# EAGLE board pcb_tsc (EAGLE 9.7.0)
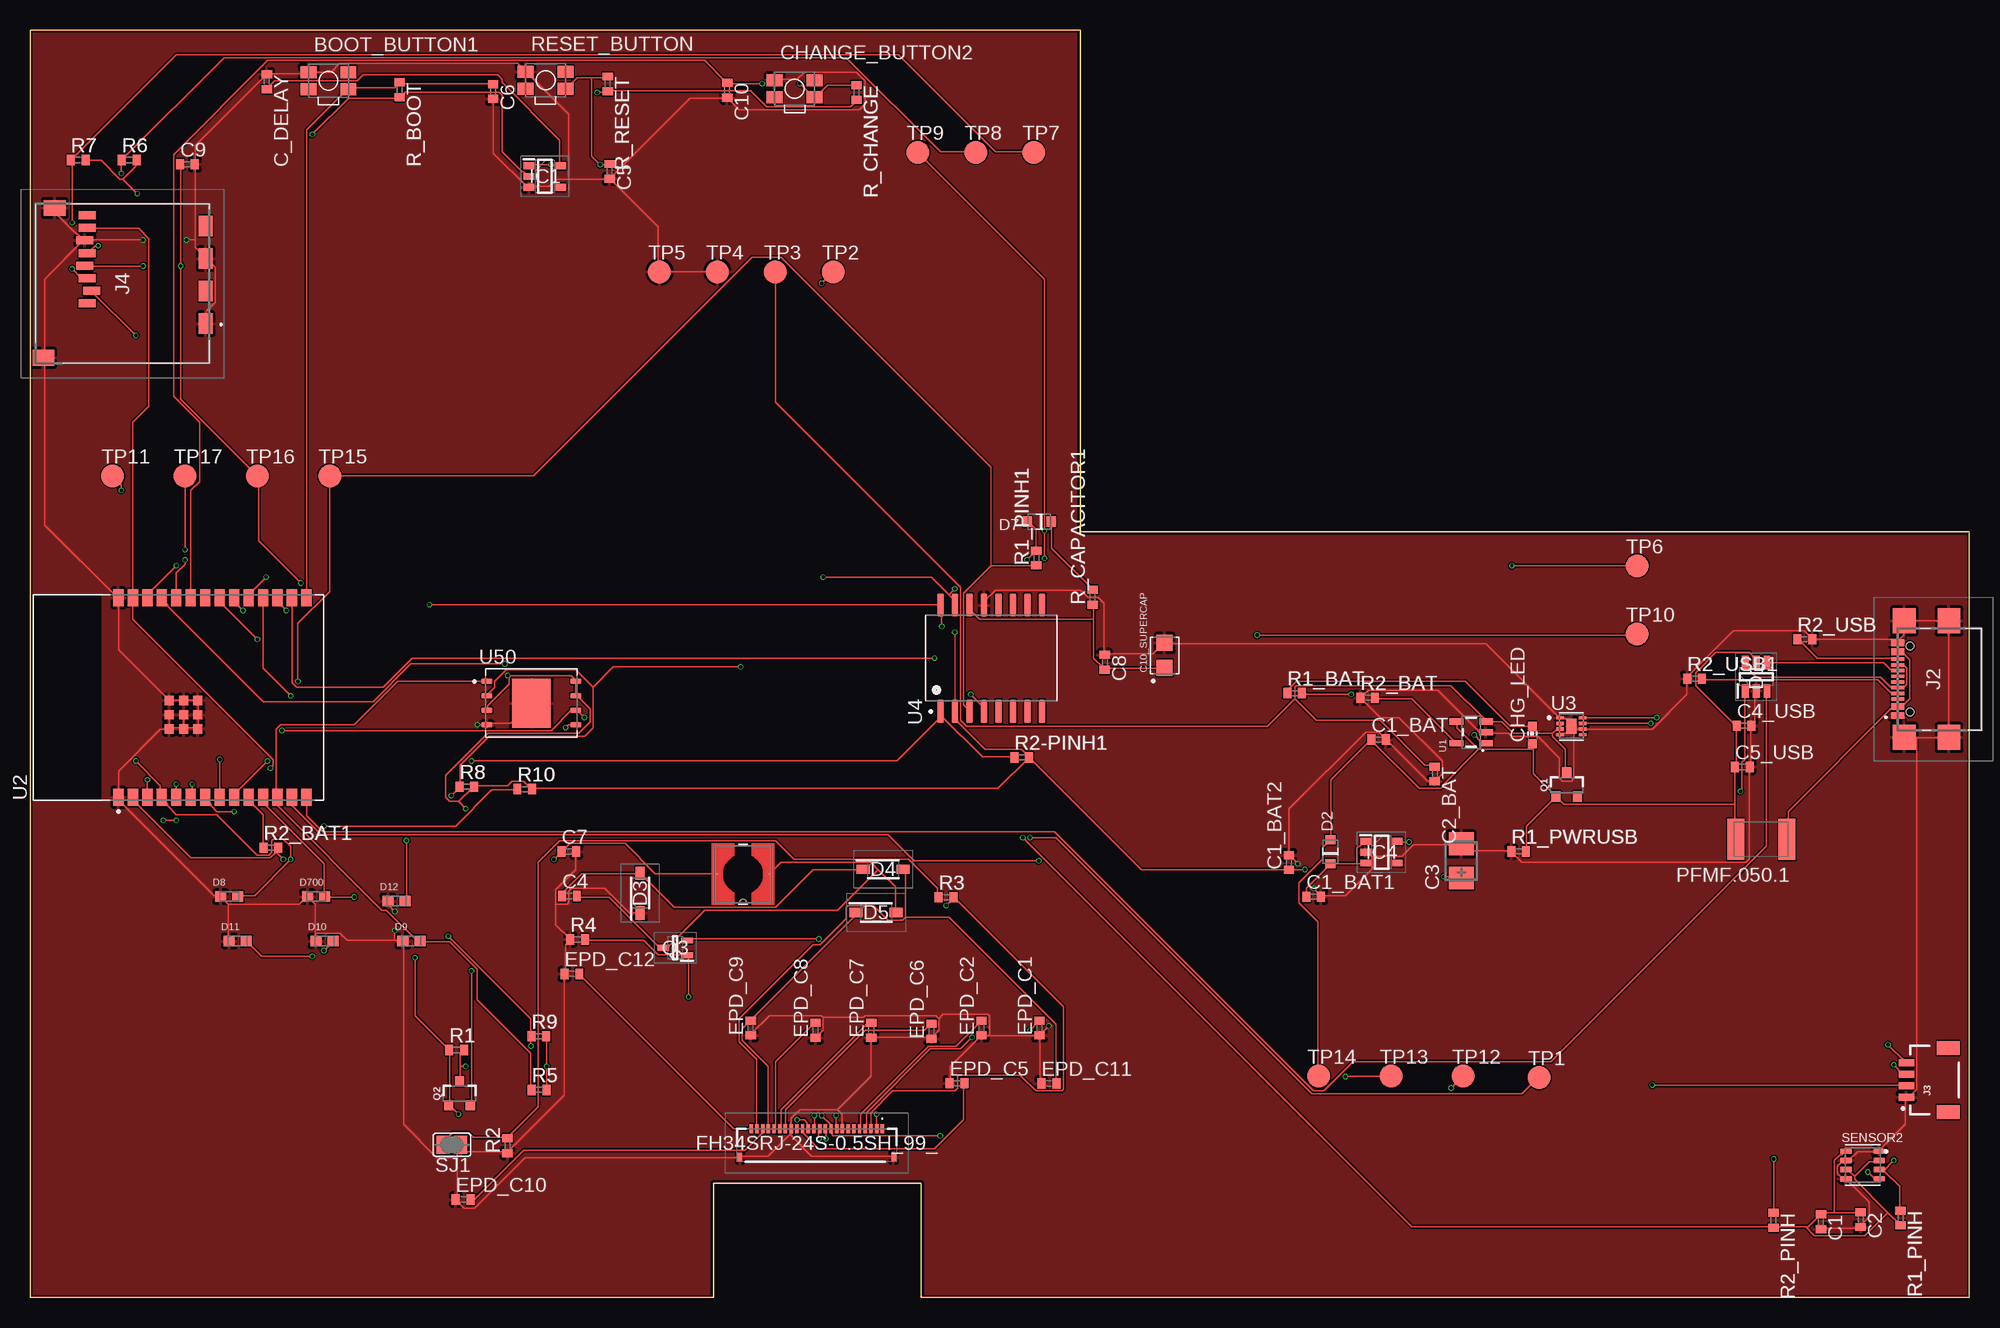
[diagram p0: board, top side]
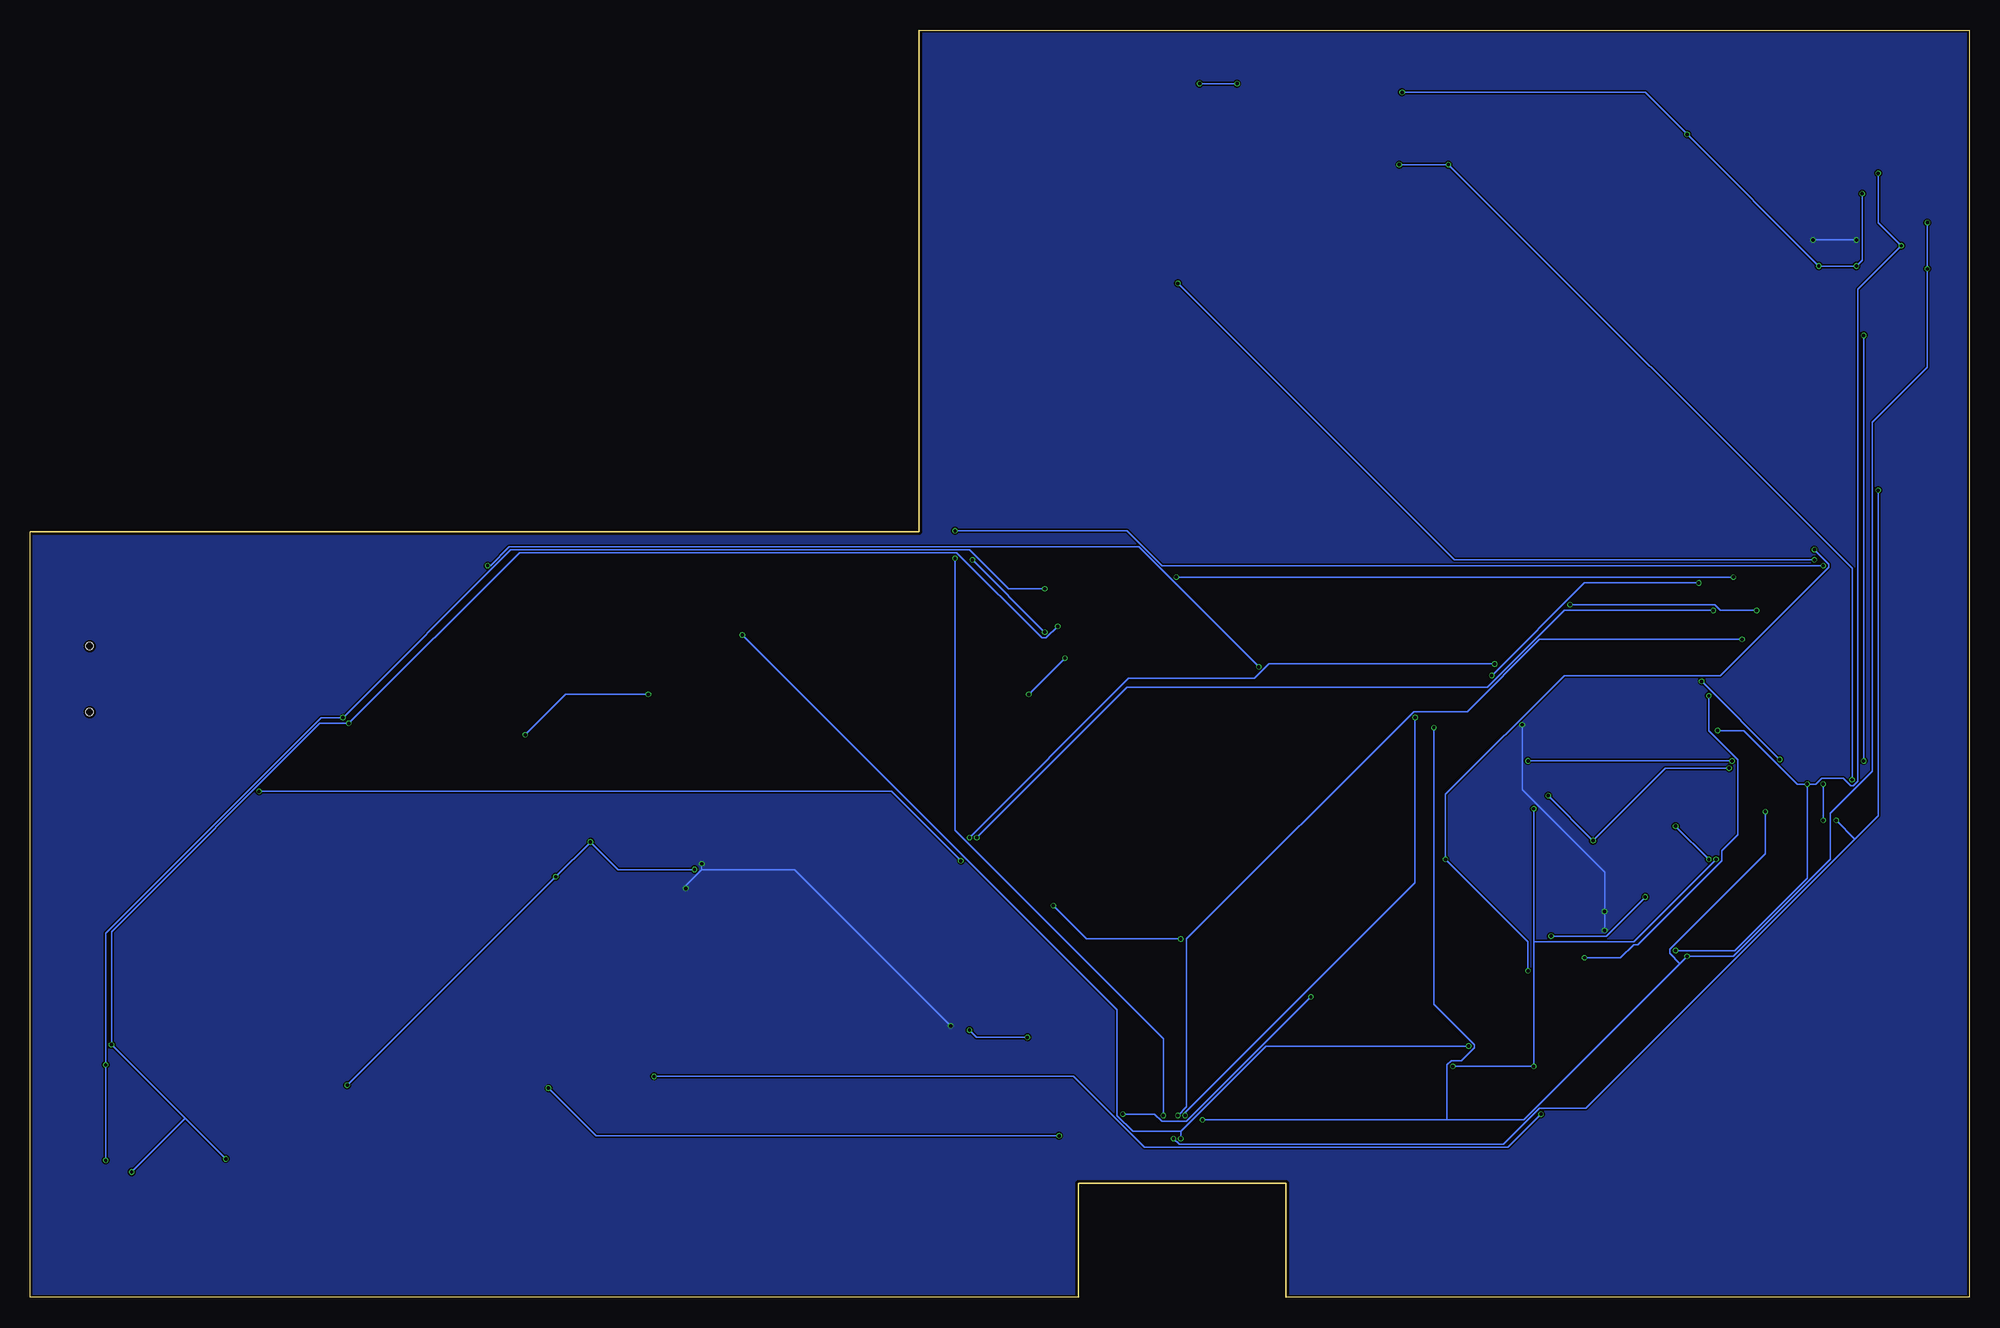
[diagram p1: board, bottom side, seen from below]

Size 170.2 x 111.2 mm. Coordinates in mm from the lower left corner, seen from the top.
Outline: 0,0 60,0 60,10 78.2,10 78.2,0 170.2,0 170.2,67.2 92.2,67.2 92.2,111.2 0,111.2 0,0
Copper layers (1*16): Top 0.035mm / dielectric 1.6mm / Bottom 0.035mm
Design rules "jlcpcb-2layers.dru": minimum track width 5mil, minimum drill 0.3mm, track to track 5mil, track to pad 5mil, pad to pad 5mil, via to via 5mil, smd to smd 5mil, copper to edge 0.2mm, drill to drill 6mil, minimum pad ring 10mil, minimum via ring 3mil, stop-mask expansion 4mil, vias tented up to drill 0mil, thermal gap 10mil

## Footprints (pad centres in the part's own frame; a part is rotated, then mirrored left to right if it is on the bottom)
MYBUTTON = smd 1.4 x 1.05: 1 1.75,0.75; 2 -1.75,0.75; 3 -1.75,-0.75; 4 1.75,-0.75
EAGLE-LTSPICE_C0402 = smd 0.7 x 0.9: 1 -0.65,0; 2 0.65,0
RCL_CT3528 = smd 2 x 2.2: + -1.5,0; - 1.5,0
CAPCP3225X100N = smd 1.4 x 1.4: 1 -1.1,0; 2 1.1,0
ADAFRUIT_CHIP-LED0603 = smd 0.8 x 0.8: A 0,-0.75; C 0,0.75
SOT95P280X145-6N = smd 1.2 x 0.6: 1 -1.25,0.95; 2 -1.25,0; 3 -1.25,-0.95; 4 1.25,-0.95; 5 1.25,0; 6 1.25,0.95
ESP32_WROVER_AVX---SD0805S020S1R0_AVX_SD0805S020S1R0_0 = smd 0.8 x 0.9: 1 -1.05,0; 2 1.05,0
SOD3716X135N = smd 1.15 x 0.8: 1 -1.75,0; 2 1.75,0
DIOC1608X36N = smd 0.97 x 0.94: 1 -0.75,0; 2 0.75,0
FH34SRJ24S05SH99 = smd 0.3 x 0.8: 1 5.75,1.45; 2 5.25,1.45; 3 4.75,1.45; 4 4.25,1.45; 5 3.75,1.45; 6 3.25,1.45; 7 2.75,1.45; 8 2.25,1.45; 9 1.75,1.45; 10 1.25,1.45; 11 0.75,1.45; 12 0.25,1.45; 13 -0.25,1.45; 14 -0.75,1.45; 15 -1.25,1.45; 16 -1.75,1.45; 17 -2.25,1.45; 18 -2.75,1.45; 19 -3.25,1.45; 20 -3.75,1.45; 21 -4.25,1.45; 22 -4.75,1.45; 23 -5.25,1.45; 24 -5.75,1.45 | smd 0.4 x 0.8: MP1 6.75,-1.05; MP2 -6.75,-1.05
SOT95P280X125-5N = smd 0.9 x 0.6: 1 -1.4,0.95; 2 -1.4,0; 3 -1.4,-0.95; 4 1.4,-0.95; 5 1.4,0.95
SOT95P280X120-5N = smd 0.9 x 0.6: 1 -1.4,0.95; 2 -1.4,0; 3 -1.4,-0.95; 4 1.4,-0.95; 5 1.4,0.95
SAMACSYS_PARTS_USB4110GFA = smd 0.3 x 1.15: A1 -3.35,3.678; A4 -2.55,3.678; A5 -1.25,3.678; A6 -0.25,3.678; A7 0.25,3.678; A8 1.25,3.678; A9 2.55,3.678; A12 3.35,3.678; B1 3.05,3.678; B4 2.25,3.678; B5 1.75,3.678; B6 0.75,3.678; B7 -0.75,3.678; B8 -1.75,3.678; B9 -2.25,3.678; B12 -3.05,3.678 | smd 2.18 x 2: MP1 -5.11,-0.827; MP2 5.11,-0.827; MP3 -5.11,3.103; MP4 5.11,3.103 | hole 0.65: -2.89,2.603; 2.89,2.603
JST04_1MM_RA = smd 0.6 x 1.35: 1 -1.5,0; 2 -0.5,0; 3 0.5,0; 4 1.5,0 | smd 1.2 x 2: NC1 2.8,-3.675; NC2 -2.8,-3.675
112ATAARR03ATTEND = smd 1.8 x 1.2: G1 10.6,10.4; G2 4.9,10.4; S1 7.75,10.4; S2 2.05,10.4 | smd 1.4 x 1.9: G3 13.6,-3.85; G4 0.45,-2.85 | smd 0.7 x 1.5: P1 8.8,0; P2 7.7,0.4; P3 6.6,0; P4 5.5,-0.2; P5 4.4,0; P6 3.3,-0.2; P7 2.2,0; P8 1.1,0
IND_4828-WE-TPC_WRE = smd 0.127 x 0.127: 1 -2.286,0; 2 2.286,0
ESP32C6_VARISTOR_CT/CN1812 = smd 1.5 x 3.6: 1 -2.25,0; 2 2.25,0
ESP32_WROVER_SPARKFUN-DISCRETESEMI_SOT23-3 = smd 0.8 x 0.9: 1 -0.95,-1; 2 0.95,-1; 3 0,1.1
SOT65P210X110-3N = smd 1.05 x 0.5: 1 -1.05,0.65; 2 -1.05,-0.65; 3 1.05,0
ESP32_WROVER_EAGLE-LTSPICE_R0402 = smd 0.7 x 0.9: 1 -0.65,0; 2 0.65,0
ESP32_WROVER_BME680_PSON80P300X300X100-8N = smd 1.016 x 0.5: 1 1.458,1.2; 2 1.458,0.4; 3 1.458,-0.4; 4 1.458,-1.2; 5 -1.458,-1.22; 6 -1.458,-0.4; 7 -1.458,0.4; 8 -1.458,1.2
SJ = smd 1.168 x 1.6: 1 -0.762,0; 2 0.762,0
TP20R = smd 2 x 2: TP 0,0
ESP32_WROVER_SPARKFUN-IC-POWER_SOT23-5 = smd 0.55 x 1.2: 1 -0.95,-1.3; 2 0,-1.3; 3 0.95,-1.3; 4 0.95,1.3; 5 -0.95,1.3
XCVR_ESP32-C6-WROOM-1-N8 = smd 1.5 x 0.9: 1 -8.75,5.26; 2 -8.75,3.99; 3 -8.75,2.72; 4 -8.75,1.45; 5 -8.75,0.18; 6 -8.75,-1.09; 7 -8.75,-2.36; 8 -8.75,-3.63; 9 -8.75,-4.9; 10 -8.75,-6.17; 11 -8.75,-7.44; 12 -8.75,-8.71; 13 -8.75,-9.98; 14 -8.75,-11.25; 15 8.75,-11.25; 16 8.75,-9.98; 17 8.75,-8.71; 18 8.75,-7.44; 19 8.75,-6.17; 20 8.75,-4.9; 21 8.75,-3.63; 22 8.75,-2.36; 23 8.75,-1.09; 24 8.75,0.18; 25 8.75,1.45; 26 8.75,2.72; 27 8.75,3.99; 28 8.75,5.26 | smd 0.8 x 0.8: 29_1 -2.755,0.79; 29_2 -1.505,0.79; 29_3 -0.255,0.79; 29_4 -2.755,-0.46; 29_5 -1.505,-0.46; 29_6 -0.255,-0.46; 29_7 -2.755,-1.71; 29_8 -1.505,-1.71; 29_9 -0.255,-1.71
SON50P200X200X80-9N = smd 0.76 x 0.27: 1 -0.985,0.75; 2 -0.985,0.25; 3 -0.985,-0.25; 4 -0.985,-0.75; 5 0.985,-0.75; 6 0.985,-0.25; 7 0.985,0.25; 8 0.985,0.75 | smd 0.9 x 1.3: 9 0,0
SOIC127P1032X265-16N = smd 2.05 x 0.59: 1 -4.655,4.445; 2 -4.655,3.175; 3 -4.655,1.905; 4 -4.655,0.635; 5 -4.655,-0.635; 6 -4.655,-1.905; 7 -4.655,-3.175; 8 -4.655,-4.445; 9 4.655,-4.445; 10 4.655,-3.175; 11 4.655,-1.905; 12 4.655,-0.635; 13 4.655,0.635; 14 4.655,1.905; 15 4.655,3.175; 16 4.655,4.445
SON127P600X800X80-9N = smd 0.94 x 0.44: 1 -3.895,1.905; 2 -3.895,0.635; 3 -3.895,-0.635; 4 -3.895,-1.905; 5 3.895,-1.905; 6 3.895,-0.635; 7 3.895,0.635; 8 3.895,1.905 | smd 3.4 x 4.3: 9 0,0

## Placement (x,y rotation side)
BOOT_BUTTON1  BUTTON_CUSYOMV1  [MYBUTTON]  26.18,106.76 0 top
C1  100uF  [EAGLE-LTSPICE_C0402]  157.18,6.63 270 top
C1_BAT  4.7uF  [EAGLE-LTSPICE_C0402]  118.36,48.95 0 top
C1_BAT1  4.7uF  [EAGLE-LTSPICE_C0402]  112.65,35.17 0 top
C1_BAT2  4.7uF  [EAGLE-LTSPICE_C0402]  110.49,38.17 90 top
C2  100uF  [EAGLE-LTSPICE_C0402]  160.66,6.83 270 top
C2_BAT  4.7uF  [EAGLE-LTSPICE_C0402]  123.28,45.93 270 top
C3  100uF TANT  [RCL_CT3528]  125.61,38.3 90 top
C4  4.7uF  [EAGLE-LTSPICE_C0402]  47.33,35.23 0 top
C4_USB  100nF  [EAGLE-LTSPICE_C0402]  150.43,50.17 0 top
C5  1uF  [EAGLE-LTSPICE_C0402]  50.87,98.81 270 top
C5_USB  100nF  [EAGLE-LTSPICE_C0402]  150.28,46.55 0 top
C6  100nF  [EAGLE-LTSPICE_C0402]  40.64,105.83 270 top
C7  10uF  [EAGLE-LTSPICE_C0402]  47.28,39.13 0 top
C8  100nF  [EAGLE-LTSPICE_C0402]  94.32,55.73 270 top
C9  100nF  [EAGLE-LTSPICE_C0402]  13.8,99.43 0 top
C10  100nF  [EAGLE-LTSPICE_C0402]  61.18,105.93 270 top
C10_SUPERCAP  CPH3225A  [CAPCP3225X100N]  99.56,56.34 90 top
C_DELAY  100nF  [EAGLE-LTSPICE_C0402]  20.77,106.69 270 top
CHANGE_BUTTON2  BUTTON_CUSYOMV1  [MYBUTTON]  67.09,106.06 0 top
CHG_LED  [ADAFRUIT_CHIP-LED0603]  131.84,49.35 0 top
D1  USBLC6-2SC6Y  [SOT95P280X145-6N]  151.5,54.47 90 top
D2  ESP32_WROVER_AVX---SD0805S020S1R0_AVX_SD0805S020S1R0_0_0AVX_SD0805S020S1R0_0_0  [ESP32_WROVER_AVX---SD0805S020S1R0_AVX_SD0805S020S1R0_0]  114.12,39.1 90 top
D3  MBR0530  [SOD3716X135N]  53.53,35.48 90 top
D4  MBR0530  [SOD3716X135N]  74.87,37.58 0 top
D5  25V  [SOD3716X135N]  74.25,33.78 0 top
D7  ESP32_WROVER_AVX---SD0805S020S1R0_AVX_SD0805S020S1R0_0_0AVX_SD0805S020S1R0_0_0  [ESP32_WROVER_AVX---SD0805S020S1R0_AVX_SD0805S020S1R0_0]  88.57,68.08 180 top
D8  PGB1010603MR  [DIOC1608X36N]  17.48,35.17 0 top
D9  PGB1010603MR  [DIOC1608X36N]  33.46,31.27 0 top
D10  PGB1010603MR  [DIOC1608X36N]  25.84,31.27 0 top
D11  PGB1010603MR  [DIOC1608X36N]  18.22,31.27 0 top
D12  PGB1010603MR  [DIOC1608X36N]  32.15,34.78 0 top
D700  PGB1010603MR  [DIOC1608X36N]  25.1,35.17 0 top
EPD_C1  1uF/50V  [EAGLE-LTSPICE_C0402]  88.59,23.65 90 top
EPD_C2  1uF/50V  [EAGLE-LTSPICE_C0402]  83.5,23.65 90 top
EPD_C5  0.1uF/50V  [EAGLE-LTSPICE_C0402]  81.35,18.79 0 top
EPD_C6  1uF/50V  [EAGLE-LTSPICE_C0402]  79.11,23.35 90 top
EPD_C7  1uF/50V  [EAGLE-LTSPICE_C0402]  73.82,23.45 90 top
EPD_C8  1uF/50V  [EAGLE-LTSPICE_C0402]  68.93,23.45 90 top
EPD_C9  1uF/50V  [EAGLE-LTSPICE_C0402]  63.24,23.65 90 top
EPD_C10  1uF/50V  [EAGLE-LTSPICE_C0402]  38.01,8.59 0 top
EPD_C11  1uF/50V  [EAGLE-LTSPICE_C0402]  89.41,18.77 0 top
EPD_C12  1uF/50V  [EAGLE-LTSPICE_C0402]  47.55,28.39 0 top
FH34SRJ-24S-0.5SH_99_  FH34SRJ-24S-0.5SH_99_  [FH34SRJ24S05SH99]  69.04,13.34 0 top
IC1  BD5229G-TR  [SOT95P280X125-5N]  45.17,98.37 0 top
IC4  XC6220A331MR-G  [SOT95P280X120-5N]  118.61,39.07 0 top
J2  SAMACSYS_PARTS_USB4110-GF-A  [SAMACSYS_PARTS_USB4110GFA]  167.59,54.26 90 top
J3  QWIIC_RIGHT_ANGLE  [JST04_1MM_RA]  164.68,19.08 90 top
J4  112A-TAAR-R03_ATTEND  [112ATAARR03ATTEND]  5,96.05 270 top
L1  68uH  [IND_4828-WE-TPC_WRE]  62.57,37.15 180 top
PFMF.050.1  ESP32C6_VARISTORCN1812  [ESP32C6_VARISTOR_CT/CN1812]  151.94,40.2 180 top
Q1  20V/4.2A/52mΩ/1.4W  [ESP32_WROVER_SPARKFUN-DISCRETESEMI_SOT23-3]  134.86,44.96 0 top
Q2  20V/4.2A/52mΩ/1.4W  [ESP32_WROVER_SPARKFUN-DISCRETESEMI_SOT23-3]  37.68,17.86 0 top
Q3  SI1308EDL-T1-GE3  [SOT65P210X110-3N]  56.62,30.68 180 top
R1  10K  [ESP32_WROVER_EAGLE-LTSPICE_R0402]  37.43,21.71 0 top
R1_BAT  200  [ESP32_WROVER_EAGLE-LTSPICE_R0402]  110.99,53.03 0 top
R1_PINH  10k  [ESP32_WROVER_EAGLE-LTSPICE_R0402]  164.17,6.97 270 top
R1_PINH1  10k  [ESP32_WROVER_EAGLE-LTSPICE_R0402]  88.31,64.89 90 top
R1_PWRUSB  100k  [ESP32_WROVER_EAGLE-LTSPICE_R0402]  130.65,39.14 0 top
R2  2.2  [ESP32_WROVER_EAGLE-LTSPICE_R0402]  41.89,13.31 90 top
R2-PINH1  10k  [ESP32_WROVER_EAGLE-LTSPICE_R0402]  87.03,47.39 0 top
R2_BAT  2K  [ESP32_WROVER_EAGLE-LTSPICE_R0402]  117.4,52.63 0 top
R2_BAT1  2K  [ESP32_WROVER_EAGLE-LTSPICE_R0402]  21.13,39.47 0 top
R2_PINH  10k  [ESP32_WROVER_EAGLE-LTSPICE_R0402]  153.01,6.77 270 top
R2_USB  5k1  [ESP32_WROVER_EAGLE-LTSPICE_R0402]  155.75,57.75 0 top
R2_USB1  5k1  [ESP32_WROVER_EAGLE-LTSPICE_R0402]  146.09,54.29 0 top
R3  0.47  [ESP32_WROVER_EAGLE-LTSPICE_R0402]  80.39,35.11 0 top
R4  10K  [ESP32_WROVER_EAGLE-LTSPICE_R0402]  48.05,31.41 0 top
R5  10K  [ESP32_WROVER_EAGLE-LTSPICE_R0402]  44.67,18.21 0 top
R6  10K  [ESP32_WROVER_EAGLE-LTSPICE_R0402]  8.69,99.81 0 top
R7  10K  [ESP32_WROVER_EAGLE-LTSPICE_R0402]  4.21,99.81 0 top
R8  10K  [ESP32_WROVER_EAGLE-LTSPICE_R0402]  38.33,44.81 0 top
R9  10K  [ESP32_WROVER_EAGLE-LTSPICE_R0402]  44.65,22.91 0 top
R10  10K  [ESP32_WROVER_EAGLE-LTSPICE_R0402]  43.41,44.61 0 top
R_BOOT  10K  [ESP32_WROVER_EAGLE-LTSPICE_R0402]  32.42,105.97 270 top
R_CAPACITOR1  15  [ESP32_WROVER_EAGLE-LTSPICE_R0402]  93.25,61.44 90 top
R_CHANGE  10K  [ESP32_WROVER_EAGLE-LTSPICE_R0402]  72.52,105.74 270 top
R_RESET  10K  [ESP32_WROVER_EAGLE-LTSPICE_R0402]  50.69,106.49 270 top
RESET_BUTTON  BUTTON_CUSYOMV1  [MYBUTTON]  45.23,106.82 0 top
SENSOR2  ESP32_WROVER_BME680_BME680  [ESP32_WROVER_BME680_PSON80P300X300X100-8N]  160.84,11.62 0 top
SJ1  [SJ]  37.01,13.39 180 top
TP1  TPTP20R  [TP20R]  132.46,19.29 0 top
TP2  TPTP20R  [TP20R]  70.48,89.99 0 top
TP3  TPTP20R  [TP20R]  65.4,89.99 0 top
TP4  TPTP20R  [TP20R]  60.32,89.99 0 top
TP5  TPTP20R  [TP20R]  55.24,89.99 0 top
TP6  TPTP20R  [TP20R]  141.06,64.19 0 top
TP7  TPTP20R  [TP20R]  88.08,100.49 0 top
TP8  TPTP20R  [TP20R]  83,100.49 0 top
TP9  TPTP20R  [TP20R]  77.92,100.49 0 top
TP10  TPTP20R  [TP20R]  141.04,58.21 0 top
TP11  TPTP20R  [TP20R]  7.24,72.09 0 top
TP12  TPTP20R  [TP20R]  125.79,19.41 0 top
TP13  TPTP20R  [TP20R]  119.44,19.41 0 top
TP14  TPTP20R  [TP20R]  113.09,19.41 0 top
TP15  TPTP20R  [TP20R]  26.29,72.09 0 top
TP16  TPTP20R  [TP20R]  19.94,72.09 0 top
TP17  TPTP20R  [TP20R]  13.59,72.09 0 top
U1  ESP32_WROVER_SPARKFUN-IC-POWER_MCP73831  [ESP32_WROVER_SPARKFUN-IC-POWER_SOT23-5]  126.48,49.59 90 top
U2  ESP32-C6-WROOM-1-N8  [XCVR_ESP32-C6-WROOM-1-N8]  13,52.64 90 top
U3  MAX17048G+T10  [SON50P200X200X80-9N]  135.27,50.12 0 top
U4  DS3231SN#  [SOIC127P1032X265-16N]  84.35,56.1 90 top
U50  W25Q512JVEIQ  [SON127P600X800X80-9N]  43.99,52.16 0 top

## Library data of the parts
BOOT_BUTTON1 CHANGE_BUTTON2 CHG_LED PFMF.050.1 SJ1 TP1-TP17 = DeskAssistant v19 v1
C1 C1_BAT C1_BAT1 C1_BAT2 C2 C2_BAT C4 C4_USB C5 C5_USB C6-C10 C_DELAY EPD_C1 EPD_C2 EPD_C5-EPD_C12 = DeskAssistant v19 v1; SPICEMODEL: NONE; SPICEPREFIX: C
C3 = DeskAssistant v19 v1; SPICEPREFIX: C
C10_SUPERCAP = DeskAssistant v19 v1; AVAILABILITY: Not in stock; CHECK_PRICES: https://www.snapeda.com/parts/CPH3225A/Seiko+Instruments/view-part/?ref=eda; DESCRIPTION: 11 mF (EDLC) Supercapacitor 3.3 V 1210 (3225 Metric) - -; MF: Seiko Instruments; MP: CPH3225A; PACKAGE: 1210 Seiko; PRICE: None; PURCHASE-URL: https://www.snapeda.com/api/url_track_click_mouser/?unipart_id=562593&manufacturer=Seiko Instruments&part_name=CPH3225A&search_term=None; SNAPEDA_LINK: https://www.snapeda.com/parts/CPH3225A/Seiko+Instruments/view-part/?ref=snap
D1 = DeskAssistant v19 v1; AVAILABILITY: In Stock; CHECK_PRICES: https://www.snapeda.com/parts/USBLC6-2SC6Y/STMicroelectronics/view-part/?ref=eda; DESCRIPTION: 17V Clamp 5A (8/20µs) Ipp Tvs Diode Surface Mount SOT-23-6; MF: STMicroelectronics; MP: USBLC6-2SC6Y; PACKAGE: SOT-23-6 STMicroelectronics; PRICE: None; SNAPEDA_LINK: https://www.snapeda.com/parts/USBLC6-2SC6Y/STMicroelectronics/view-part/?ref=snap
D2 D7 = DeskAssistant v19 v1; CENTROID_NOT_SPECIFIED: No; DATASHEET: http://datasheets.avx.com/schottky.pdf; DIGIKEY_DESCRIPTION: DIODE SCHOTTKY 20V 1A 0805; DIGIKEY_PART_NUMBER: 478-7800-1-ND; LEAD_FREE: yes; MF: AVX; MOUSER_PART_NUMBER: 581-SD0805S020S1R0; PACKAGE: 0805 (2012 metric); PREFIX: D; ROHS: yes; TEMPERATURE_RANGE_HIGH: +125°C; TEMPERATURE_RANGE_LOW: -55°C
D3-D5 = DeskAssistant v19 v1; AVAILABILITY: In Stock; CHECK_PRICES: https://www.snapeda.com/parts/MBR0530/Onsemi/view-part/?ref=eda; DESCRIPTION: Diode Schottky 30 V 500mA Surface Mount SOD-123; MF: ON Semiconductor; MP: MBR0530; PACKAGE: SOD-123-2 ON Semiconductor; PRICE: None; PURCHASE-URL: https://www.snapeda.com/api/url_track_click_mouser/?unipart_id=179458&manufacturer=ON Semiconductor&part_name=MBR0530&search_term=None; SNAPEDA_LINK: https://www.snapeda.com/parts/MBR0530/Onsemi/view-part/?ref=snap
D8-D12 D700 = DeskAssistant v19 v1; AVAILABILITY: In Stock; CHECK_PRICES: https://www.snapeda.com/parts/PGB1010603MR/Littelfuse/view-part/?ref=eda; DESCRIPTION: 150V (Typ) Clamp - Ipp Tvs Diode Surface Mount 0603 (1608 Metric); MF: Littelfuse Inc.; MP: PGB1010603MR; PACKAGE: 0603 Littelfuse Inc.; PRICE: None; PURCHASE-URL: https://www.snapeda.com/api/url_track_click_mouser/?unipart_id=5659453&manufacturer=Littelfuse Inc.&part_name=PGB1010603MR&search_term=None; SNAPEDA_LINK: https://www.snapeda.com/parts/PGB1010603MR/Littelfuse/view-part/?ref=snap
FH34SRJ-24S-0.5SH_99_ = DeskAssistant v19 v1; DESCRIPTION: 24 Position FFC, FPC Connector Contacts, Top and Bottom 0.020" (0.50mm) Surface Mount, Right Angle; HEIGHT: 1.1mm; MANUFACTURER_NAME: Hirose; MANUFACTURER_PART_NUMBER: FH34SRJ-24S-0.5SH(99); MOUSER_PART_NUMBER: 798-FH34SRJ24S05SH99; MOUSER_PRICE-STOCK: https://www.mouser.co.uk/ProductDetail/Hirose-Connector/FH34SRJ-24S-0.5SH99?qs=vcbW%252B4%252BSTIpKBl5ap9J8Fw%3D%3D
IC1 = DeskAssistant v19 v1; DESCRIPTION: Voltage Detector with Adjustable Delay Time: CMOS processes are utilized to develop high precision, low current consumption CMOS reset ICs that allow arbitrary setting of the delay time. The extensive lineup includes both Nch Open Drain and CMOS output types in a wide range of detection voltages (from 2.3V to 6.0V, in 0.1V steps), enabling selection of the ideal solution based on customer requirements. In addition, the entire series is of course both lead-free and RoHS-compliant.; HEIGHT: 1.25mm; MANUFACTURER_NAME: ROHM Semiconductor; MANUFACTURER_PART_NUMBER: BD5229G-TR; MOUSER_PART_NUMBER: 755-BD5229G-TR; MOUSER_PRICE-STOCK: https://www.mouser.co.uk/ProductDetail/ROHM-Semiconductor/BD5229G-TR?qs=4kLU8WoGk0vvnhrrYwdszw%3D%3D
IC4 = DeskAssistant v19 v1; DESCRIPTION: LDO Voltage Regulators; HEIGHT: 1.2mm; MANUFACTURER_NAME: Torex; MANUFACTURER_PART_NUMBER: XC6220A331MR-G; MOUSER_PART_NUMBER: 865-XC6220A331MR-G; MOUSER_PRICE-STOCK: https://www.mouser.co.uk/ProductDetail/Torex-Semiconductor/XC6220A331MR-G?qs=AsjdqWjXhJ8ZSWznL1J0gg%3D%3D
J2 = DeskAssistant v19 v1; DESCRIPTION: CONN USB 2.0 TYPE-C R/A SMT; HEIGHT: 3.26mm; MANUFACTURER_NAME: GCT (GLOBAL CONNECTOR TECHNOLOGY); MANUFACTURER_PART_NUMBER: USB4110-GF-A; MOUSER_PART_NUMBER: 640-USB4110-GF-A; MOUSER_PRICE-STOCK: https://www.mouser.co.uk/ProductDetail/GCT/USB4110-GF-A?qs=KUoIvG%2F9IlYiZvIXQjyJeA%3D%3D
J3 = DeskAssistant v19 v1; PROD_ID: CONN-13694
J4 = DeskAssistant v19 v1; DESCRIPTION: Micro SD Card Socket, Push-Push Type, Top Mount, SMT, H=1.83mm, 10u; HEIGHT: 1.9mm; MANUFACTURER_NAME: ATTEND; MANUFACTURER_PART_NUMBER: 112A-TAAR-R03 ATTEND
L1 = DeskAssistant v19 v1; COPYRIGHT: Copyright (C) 2024 Ultra Librarian. All rights reserved.; MANUFACTURER_PART_NUMBER: 744043680; MFR_NAME: Wurth Electronics
Q1 Q2 = DeskAssistant v19 v1; PROD_ID: TRAN-14388
Q3 = DeskAssistant v19 v1; AVAILABILITY: In Stock; CHECK_PRICES: https://www.snapeda.com/parts/SI1308EDL-T1-GE3/Vishay+Siliconix/view-part/?ref=eda; DESCRIPTION: Si1308EDL-T1-GE3 N-channel MOSFET Transistor, 1.5 A, 30 V, 3-Pin SC-70 | Siliconix / Vishay SI1308EDL-T1-GE3; MF: Vishay Siliconix; MP: SI1308EDL-T1-GE3; PACKAGE: SOT-323 Vishay Semiconductor; PRICE: None; PURCHASE-URL: https://www.snapeda.com/api/url_track_click_mouser/?unipart_id=274603&manufacturer=Vishay Siliconix&part_name=SI1308EDL-T1-GE3&search_term=None; SNAPEDA_LINK: https://www.snapeda.com/parts/SI1308EDL-T1-GE3/Vishay+Siliconix/view-part/?ref=snap
R1 R1_BAT R1_PINH R1_PINH1 R1_PWRUSB R2 R2-PINH1 R2_BAT R2_BAT1 R2_PINH R2_USB R2_USB1 R3-R10 R_BOOT R_CAPACITOR1 R_CHANGE R_RESET = DeskAssistant v19 v1; SPICEMODEL: NONE; SPICEPREFIX: R
RESET_BUTTON = DeskAssistant v19 v1; SPICEPREFIX: K
SENSOR2 = DeskAssistant v19 v1; AVAILABILITY: Unavailable; DESCRIPTION: Integrated Environmental Unit; MF: Bosch Sensortec; MP: BME680; PACKAGE: LGA-8 Bosch Tools; PRICE: None
U1 = DeskAssistant v19 v1; PROD_ID: IC-09995
U2 = DeskAssistant v19 v1; AVAILABILITY: In Stock; CHECK_PRICES: https://www.snapeda.com/parts/ESP32-C6-WROOM-1-N8/Espressif+Systems/view-part/?ref=eda; DESCRIPTION: Multiprotocol Modules ESP32-C6 module, Wi-Fi 6 in 2.4 GHz band, Bluetooth 5, Zigbee 3.0 and Thread. ESP34-WROOM Compatible - ENGINEERING SAMPLE; MF: Espressif Systems; MP: ESP32-C6-WROOM-1-N8; PACKAGE: None; PRICE: None; SNAPEDA_LINK: https://www.snapeda.com/parts/ESP32-C6-WROOM-1-N8/Espressif+Systems/view-part/?ref=snap
U3 = DeskAssistant v19 v1; AVAILABILITY: In Stock; CHECK_PRICES: https://www.snapeda.com/parts/MAX17048G+T10/Analog+Devices/view-part/?ref=eda; DESCRIPTION: 3µA 1-Cell/2-Cell Fuel Gauge with ModelGauge; MF: Analog Devices; MP: MAX17048G+T10; PACKAGE: TDFN-8 Maxim; PRICE: None; PURCHASE-URL: https://www.snapeda.com/api/url_track_click_mouser/?unipart_id=329239&manufacturer=Analog Devices&part_name=MAX17048G+T10&search_term=None; SNAPEDA_LINK: https://www.snapeda.com/parts/MAX17048G+T10/Analog+Devices/view-part/?ref=snap
U4 = DeskAssistant v19 v1; AVAILABILITY: In Stock; CHECK_PRICES: https://www.snapeda.com/parts/DS3231SN%23/Analog+Devices/view-part/?ref=eda; DESCRIPTION: Extremely Accurate I²C-Integrated RTC/TCXO/Crystal; MF: Analog Devices; MP: DS3231SN#; PACKAGE: SOIC-16 Maxim; PRICE: None; PURCHASE-URL: https://www.snapeda.com/api/url_track_click_mouser/?unipart_id=99048&manufacturer=Analog Devices&part_name=DS3231SN#&search_term=None; SNAPEDA_LINK: https://www.snapeda.com/parts/DS3231SN%23/Analog+Devices/view-part/?ref=snap
U50 = DeskAssistant v19 v1; AVAILABILITY: In Stock; CHECK_PRICES: https://www.snapeda.com/parts/W25Q512JVEIQ/Winbond+Electronics/view-part/?ref=eda; DESCRIPTION: FLASH - NOR Memory IC 512Mb (64M x 8) SPI - Quad I/O 133 MHz 8-WSON (8x6); MF: Winbond Electronics; MP: W25Q512JVEIQ; PACKAGE: Package; PRICE: None; SNAPEDA_LINK: https://www.snapeda.com/parts/W25Q512JVEIQ/Winbond+Electronics/view-part/?ref=snap

## Nets
3V3: C1_BAT2.1 C3.+ C9.1 D7.2 IC1.2 IC4.5 J3.2 J4.P4 Q2.3 R1.2 R1_PINH1.2 R2-PINH1.2 R2_BAT1.2 R5.2 R6.2 R7.2 R8.2 R9.2 R10.2 R_BOOT.2 R_CHANGE.2 R_RESET.2 TP16.TP U2.2 U4.2 U50.3 U50.7 U50.8
32KHZ: R2-PINH1.1 U2.9 U4.1
DN: D1.6 J2.A8 J2.B7
DP: D1.4 J2.A7 J2.B6
EPD_3V3: C7.1 L1.2 Q2.2 TP17.TP
EPD_3V3_C: Q2.1 R1.1 TP13.TP U2.18
EPD_BUSY: FH34SRJ-24S-0.5SH_99_.9 TP9.TP U2.26
EPD_CS: D700.2 FH34SRJ-24S-0.5SH_99_.12 R9.1 TP10.TP U2.11
EPD_DC: FH34SRJ-24S-0.5SH_99_.11 TP11.TP U2.5
EPD_RST: FH34SRJ-24S-0.5SH_99_.10 TP12.TP U2.21
FLASH_CS: D9.2 R5.1 U2.12 U50.1
GDR: FH34SRJ-24S-0.5SH_99_.2 Q3.1 R4.2
GND: BOOT_BUTTON1.2 C1.2 C1_BAT1.2 C1_BAT2.2 C1_BAT.2 C2.2 C2_BAT.2 C3.- C4_USB.2 C5.2 C5_USB.2 C6.2 C7.2 C8.1 C9.2 C10.2 C10_SUPERCAP.2 C_DELAY.1 CHANGE_BUTTON2.2 D1.2 D3.1 D8.1 D9.1 D10.1 D11.1 D12.1 D700.1 EPD_C1.1 EPD_C2.1 EPD_C5.1 EPD_C6.1 EPD_C7.1 EPD_C8.1 EPD_C9.1 EPD_C10.1 EPD_C11.1 EPD_C12.1 FH34SRJ-24S-0.5SH_99_.8 FH34SRJ-24S-0.5SH_99_.17 FH34SRJ-24S-0.5SH_99_.MP1 FH34SRJ-24S-0.5SH_99_.MP2 IC1.3 IC4.2 J2.A1 J2.A12 J2.B1 J2.B12 J2.MP1 J2.MP2 J2.MP3 J2.MP4 J3.1 J4.G1 J4.G2 J4.G3 J4.G4 J4.P6 R1_PWRUSB.1 R2.1 R2_BAT.1 R2_USB1.1 R2_USB.2 R4.1 RESET_BUTTON.2 SENSOR2.1 SENSOR2.5 SENSOR2.7 SJ1.1 TP4.TP TP5.TP U1.2 U2.1 U2.28 U2.29_1 U2.29_2 U2.29_3 U2.29_4 U2.29_5 U2.29_6 U2.29_7 U2.29_8 U2.29_9 U3.1 U3.4 U3.6 U3.9 U4.13 U50.4 U50.9
GPIO8: R2_BAT1.1 U2.10
I2C_PW: C1.1 C2.1 R1_PINH.2 R2_PINH.2 SENSOR2.2 SENSOR2.6 SENSOR2.8 U2.17
INT_RTC: R1_PINH1.1 TP15.TP U2.8 U4.3
IO/BOOT: BOOT_BUTTON1.4 C6.1 R_BOOT.1 U2.15
IO/CHANGE: C10.1 CHANGE_BUTTON2.4 R_CHANGE.1 U2.23
MISO: D12.2 J4.P7 R8.1 TP6.TP U2.27 U50.2
MOSI: D11.2 FH34SRJ-24S-0.5SH_99_.14 J4.P3 R7.1 TP7.TP U2.7 U50.5
N$1: J2.A5 R2_USB1.2
N$2: J2.B5 R2_USB.1
N$4: C1_BAT1.1 D2.1 IC4.1 IC4.3
N$5: EPD_C12.2 FH34SRJ-24S-0.5SH_99_.24
N$6: C4.1 D3.2 D4.1
N$8: R1_BAT.2 U1.1
N$9: CHG_LED.C R1_BAT.1
N$10: R2_BAT.2 U1.5
N$11: EPD_C10.2 FH34SRJ-24S-0.5SH_99_.22
N$12: EPD_C5.2 FH34SRJ-24S-0.5SH_99_.15 FH34SRJ-24S-0.5SH_99_.16
N$13: EPD_C7.2 FH34SRJ-24S-0.5SH_99_.19
N$14: EPD_C6.2 FH34SRJ-24S-0.5SH_99_.18
N$15: EPD_C2.2 FH34SRJ-24S-0.5SH_99_.5
N$16: EPD_C1.2 FH34SRJ-24S-0.5SH_99_.4
N$17: C_DELAY.2 IC1.5
N$18: D7.1 R_CAPACITOR1.2
N$19: EPD_C8.2 FH34SRJ-24S-0.5SH_99_.20
PREVGH: D5.1 EPD_C9.2 FH34SRJ-24S-0.5SH_99_.21
PREVGL: D4.2 EPD_C11.2 FH34SRJ-24S-0.5SH_99_.23
RESE: FH34SRJ-24S-0.5SH_99_.3 Q3.2 R3.2
RESE': R2.2 R3.1 SJ1.2
RESET: C5.1 IC1.1 R_RESET.1 RESET_BUTTON.4 U2.3
RTC_RST: U2.16 U4.4
RX: TP2.TP U2.24
SCK: D10.2 FH34SRJ-24S-0.5SH_99_.13 J4.P5 R6.1 TP8.TP U2.6 U50.6
SCL: J3.4 R2_PINH.1 SENSOR2.4 U2.20 U3.7 U4.16
SDA: J3.3 R1_PINH.1 SENSOR2.3 U2.19 U3.8 U4.15
SRC: C4.2 D5.2 L1.1 Q3.3
SS_SD: D8.2 J4.P2 R10.1 U2.4
TX: TP1.TP U2.25
USB_D+: D1.3 U2.14
USB_D-: D1.1 U2.13
VBAT: C2_BAT.1 Q1.3 TP3.TP U1.3 U3.2 U3.3
VBUS: C1_BAT.1 C4_USB.1 C5_USB.1 CHG_LED.A D1.5 D2.2 PFMF.050.1.2 Q1.1 R1_PWRUSB.2 TP14.TP U1.4
VRTC: C8.2 C10_SUPERCAP.1 R_CAPACITOR1.1 U4.14
VUSB: J2.A4 J2.A9 J2.B4 J2.B9 PFMF.050.1.1

## Tracks (layer width: path | path; a pad name or v marks a point on that pad's centre or on a via)
3V3  (via drill 0.3)
  Top 0.127: R_CHANGE.2 72.52,104.99 72.01,104.48 64.64,104.48 63.25,105.88 50.8,105.88 R_RESET.2 50.67,105.75 v49.78,105.75 | IC1.2 43.69,98.38 43.31,98.77 43.18,98.77 41.4,100.54 41.4,105.5 41.15,105.75 32.89,105.75 32.51,105.37 R_BOOT.2 32.38,105.24 27.94,105.24 v24.77,102.07 | 8.13,98.13 7.87,98.13 6.22,99.78 4.95,99.78 R7.2 | 8.13,98.13 9.27,99.27 9.27,99.78 R6.2 | C9.1 13.21,99.4 v13.21,90.51 13.21,78.83 TP16.TP 20.07,71.97 20.07,66.38 v23.75,62.7 | v9.91,90.51 4.83,90.51 J4.P4 | v9.4,96.86 8.13,98.13 | 21.59,39.08 21.08,38.57 14.1,38.57 8.89,43.77 U2.2 | 21.59,39.08 21.72,39.2 21.72,39.46 R2_BAT1.2 21.59,39.08 | 37.72,20.28 37.72,21.42 37.97,21.68 R1.2 | 37.72,20.28 37.72,19.01 Q2.3 | R5.2 45.34,18.25 v45.34,20.28 45.34,22.82 R9.2 | v38.23,20.28 37.72,20.28 | 42.04,54.44 42.04,53.81 40.13,51.9 40.13,51.65 U50.3 | 42.04,54.44 42.16,54.57 47.5,54.57 47.88,54.19 U50.8 47.88,54.06 47.88,52.92 U50.7 48.01,52.79 49.15,51.65 49.15,50.5 48.13,49.49 40.13,49.49 36.45,45.81 36.45,43.9 36.83,43.52 37.59,43.52 | 37.59,43.52 38.86,44.79 R8.2 38.99,44.92 41.91,44.92 42.29,45.3 43.31,45.3 43.94,44.66 R10.2 44.07,44.66 84.96,44.66 87.63,47.33 R2-PINH1.2 | 37.59,43.52 v38.23,42.88 | v22.23,38.44 21.59,39.08 | D7.2 87.63,68.03 88.27,67.4 88.27,65.62 R1_PINH1.2 88.27,65.49 v87.5,64.73 | v81.15,58.38 81.15,51.52 U4.2 81.28,51.39 81.28,50.63 83.82,48.09 87,48.09 87.63,47.46 R2-PINH1.2 | 110.49,37.55 97.54,37.55 87.76,47.33 R2-PINH1.2 | v121.03,39.96 120.02,39.96 IC4.5 | v124.08,36.92 125.6,36.92 C3.+ | v142.37,18.63 164.59,18.63 J3.2 | v111.89,37.55 110.49,37.55 | 110.49,37.55 C1_BAT2.1
  Top 0.127: 42.04,54.44 v41.91,54.57
  Bottom 0.127: v9.4,96.86 9.4,91.02 v9.91,90.51 v13.21,90.51 v24.77,102.07 28.45,105.75 v49.78,105.75 | v45.34,20.28 v38.23,20.28 38.23,31.2 | v38.23,42.88 38.23,31.2 | v22.23,38.44 29.46,31.2 38.23,31.2 | v81.15,58.38 v87.5,64.73 | v142.37,18.63 v124.08,36.92 v121.03,39.96 118.62,37.55 v111.89,37.55 | v23.75,62.7 33.78,62.7 v41.91,54.57
32KHZ  (via drill 0.3)
  Top 0.127: 80.01,51.01 83.57,47.46 86.36,47.46 R2-PINH1.1 | 80.01,51.01 80.01,51.39 U4.1 80.01,51.01 | v20.83,47.08 17.91,44.16 17.91,43.9 U2.9 | v38.73,47.08 76.07,47.08 80.01,51.01
  Bottom 0.127: v38.73,47.08 v20.83,47.08
DN
  Top 0.127: J2.A8 163.96,55.46 164.47,55.46 164.72,55.2 164.72,53.81 164.47,53.55 163.96,53.55 J2.B7 163.83,53.55 163.32,53.55 162.43,54.44 151.51,54.44 150.62,55.33 150.62,55.71 D1.6
DP
  Top 0.127: J2.A7 163.96,54.57 163.96,54.95 J2.B6 163.83,55.08 163.32,55.08 162.69,55.71 152.53,55.71 D1.4
EPD_3V3  (via drill 0.3)
  Top 0.127: v38.73,28.66 38.73,16.98 Q2.2 | v45.97,38.44 46.61,39.08 C7.1 46.74,39.2 47.37,39.84 52.2,39.84 54.86,37.17 60.2,37.17 L1.2 | v13.59,65.62 13.59,71.97 TP17.TP
  Bottom 0.127: v38.73,28.66 38.73,31.2 v45.97,38.44 45.97,44.16 35.56,54.57 21.84,54.57 12.32,64.09 12.32,64.35 v13.59,65.62
EPD_3V3_C  (via drill 0.3)
  Top 0.127: v22.86,52.79 20.45,55.2 20.45,61.3 U2.18 | v33.78,29.8 33.78,24.72 36.7,21.8 R1.1 36.83,21.68 36.83,16.98 Q2.1 36.83,16.85 v37.59,16.09 | v115.44,19.39 119.38,19.39 TP13.TP
  Bottom 0.127: v22.86,52.79 22.86,49.74 20.32,47.2 20.32,40.6 21.72,39.2 21.72,38.31 29.08,30.95 29.46,30.95 30.61,29.8 v33.78,29.8 | v115.44,19.39 78.61,19.39 72.39,13.17 40.51,13.17 v37.59,16.09
EPD_BUSY  (via drill 0.3)
  Top 0.127: v70.74,15.96 70.74,14.82 FH34SRJ-24S-0.5SH_99_.9 | v89.03,64.86 v89.03,67.27 89.03,89.37 77.98,100.42 TP9.TP | v12.83,64.22 10.29,61.68 10.29,61.43 U2.26
  Bottom 0.127: v70.74,15.96 70.74,22.69 89.03,40.98 v89.03,64.86 | v12.83,64.22 70.87,64.22 73.91,67.27 v89.03,67.27
EPD_CS  (via drill 0.3)
  Top 0.127: U2.11 20.45,43.77 20.45,43.39 25.78,38.06 25.78,35.27 D700.2 25.91,35.14 v28.45,35.14 | v69.22,13.93 69.22,14.69 FH34SRJ-24S-0.5SH_99_.12 | v43.94,22.06 43.94,22.82 R9.1 43.94,22.95 43.94,24.47 v36.7,31.71 | v107.7,58.12 140.97,58.12 TP10.TP
  Bottom 0.127: 69.22,14.56 v69.22,13.93 | 69.22,14.56 61.72,22.06 v43.94,22.06 | v107.7,58.12 74.8,25.23 74.8,15.96 73.41,14.56 69.22,14.56 | v28.45,35.14 31.88,31.71 v36.7,31.71
EPD_DC  (via drill 0.3)
  Top 0.127: v69.85,13.93 69.85,14.69 FH34SRJ-24S-0.5SH_99_.11 | v8,70.83 8,71.33 7.37,71.97 TP11.TP | v12.83,45.04 12.83,43.9 U2.5 | v11.68,41.87 v12.83,41.87
  Bottom 0.127: v69.85,13.93 69.34,13.42 40.89,13.42 37.72,16.6 33.66,16.6 10.03,40.22 | 10.03,40.22 8,42.25 v8,70.83 | v12.83,41.87 v12.83,45.04 | 10.03,40.22 v11.68,41.87
EPD_RST  (via drill 0.3)
  Top 0.127: v79.88,14.18 70.48,14.18 70.36,14.31 70.36,14.69 FH34SRJ-24S-0.5SH_99_.10 70.23,14.82 70.23,15.2 v69.47,15.96 | v124.71,18.37 125.73,19.39 TP12.TP | v19.94,57.74 16.64,61.05 16.64,61.3 U2.21
  Bottom 0.127: v79.88,14.18 120.52,14.18 v124.71,18.37 | v19.94,57.74 37.72,57.74 44.07,51.39 48.77,51.39 68.71,31.45 68.71,16.72 v69.47,15.96
FLASH_CS
  Top 0.127: R5.1 43.94,18.25 43.94,21.42 39.24,26.12 39.24,28.79 36.83,31.2 34.29,31.2 D9.2 34.16,31.33 33.91,31.33 31.24,33.99 30.86,33.99 21.72,43.14 21.72,43.77 U2.12 21.59,43.9 21.59,49.87 21.97,50.25 28.45,50.25 32.26,54.06 40.01,54.06 U50.1
GDR  (via drill 0.3)
  Top 0.127: v74.3,16.09 74.3,14.82 FH34SRJ-24S-0.5SH_99_.2 | v57.78,26.38 57.78,29.93 Q3.1 57.66,30.06 55.12,30.06 53.85,31.33 48.77,31.33 R4.2
  Bottom 0.127: v74.3,16.09 71.5,16.09 70.87,15.45 68.71,15.45 v57.78,26.38
GND  (via drill 0.3)
  Top 0.127: D1.2 151.38,53.17 151.38,50.5 151.13,50.25 C4_USB.2 151,50.12 151,46.57 C5_USB.2 150.88,46.44 150.88,38.44 150.62,38.19 130.94,38.19 130.05,39.08 R1_PWRUSB.1 129.92,39.2 126.24,39.2 125.73,39.71 C3.- 125.6,39.71 121.41,39.71 120.4,38.69 117.73,38.69 | 117.73,38.69 117.47,38.95 117.22,38.95 IC4.2 | 117.73,38.69 117.86,38.57 117.86,37.68 115.44,35.27 113.41,35.27 C1_BAT1.2 113.28,35.27 v112.65,35.9 | C1_BAT2.2 110.49,42.88 117.22,49.62 118.36,49.62 119,48.98 C1_BAT.2 119.13,48.85 122.68,45.3 123.19,45.3 C2_BAT.2 123.32,45.3 123.95,45.93 123.95,47.08 120.14,50.89 118.49,50.89 116.84,52.54 R2_BAT.1 116.84,52.66 117.47,53.3 123.57,53.3 127.25,49.62 127.76,49.62 U1.2 127.89,49.49 129.79,49.49 130.05,49.23 132.33,49.23 134.24,47.33 134.24,45.55 134.49,45.3 135.25,45.3 135.51,45.55 135.51,49.87 | U4.13 83.82,60.79 83.82,61.17 84.71,62.06 92.2,62.06 92.84,61.43 93.73,61.43 94.23,60.92 94.23,56.47 C8.1 94.36,56.47 98.55,56.47 99.44,57.36 C10_SUPERCAP.2 99.57,57.36 127.76,57.36 134.24,50.89 U3.1 134.37,50.76 134.75,50.76 135.38,50.12 U3.9 | C1.2 157.23,6.05 160.66,6.05 C2.2 160.78,6.18 160.78,6.44 161.42,7.07 161.42,8.34 159.38,10.37 SENSOR2.5 159.26,10.5 159,10.5 158.62,10.88 158.62,11.52 159,11.9 159.26,11.9 SENSOR2.7 159.64,12.02 160.4,12.79 162.18,12.79 SENSOR2.1 162.31,12.91 164.59,15.2 164.59,17.48 J3.1 164.72,17.61 164.97,17.61 165.61,18.25 165.61,49.11 | U3.4 134.37,49.49 134.75,49.49 135.25,50 U3.9 | 135.51,49.87 U3.6 142.37,49.87 145.41,52.92 145.41,54.19 R2_USB1.1 145.54,54.31 145.54,54.57 149.48,58.51 155.7,58.51 156.34,57.87 R2_USB.2 156.46,57.74 163.7,57.74 163.83,57.62 J2.A12
  Top 0.127: 135.51,49.87 135.38,50 U3.9 | J2.B12 163.96,51.14 163.96,51.01 J2.A1 163.96,50.89 163.96,49.74 164.47,49.23 J2.MP3 164.59,49.11 165.61,49.11 | 165.61,49.11 168.4,49.11 J2.MP1 168.4,49.23 168.4,59.27 J2.MP2 168.4,59.39 164.59,59.39 J2.MP4 164.47,59.27 164.47,58.12 163.96,57.62 J2.A12 | J2.B1 163.96,57.36 163.96,57.49 J2.A12 | 135.51,49.87 U3.9 | C1_BAT2.2 v111.25,38.06 | C1_BAT2.2 | EPD_C11.1 88.65,18.88 88.65,22.95 EPD_C1.1 | EPD_C5.1 80.77,18.88 80.77,20.28 83.44,22.95 EPD_C2.1 83.57,22.95 84.2,22.95 | 84.2,22.95 88.52,22.95 EPD_C1.1 | 69.6,24.6 69.6,23.45 68.96,22.82 EPD_C8.1 | 69.6,24.6 69.47,24.72 64.9,24.72 63.25,23.07 EPD_C9.1 | 66.67,14.31 64.77,12.4 62.36,12.4 FH34SRJ-24S-0.5SH_99_.MP2 62.23,12.28 43.43,12.28 38.99,7.83 38.1,7.83 37.47,8.47 EPD_C10.1 37.47,8.59 37.47,12.28 | 66.67,14.31 66.67,14.69 FH34SRJ-24S-0.5SH_99_.17 66.8,14.82 66.8,15.71 67.56,16.47 70.87,16.47 | 70.87,16.47 71.25,16.09 71.25,14.82 FH34SRJ-24S-0.5SH_99_.8 | 66.67,14.31 68.58,12.4 75.69,12.4 FH34SRJ-24S-0.5SH_99_.MP1 | 70.87,16.47 73.79,19.39 73.79,22.69 EPD_C7.1 73.91,22.82 78.99,22.82 EPD_C6.1 79.12,22.82 79.76,23.45 79.76,24.47 | 69.6,24.6 73.15,24.6 73.28,24.72 79.5,24.72 79.76,24.47 | 84.2,22.95 84.2,24.72 84.07,24.85 80.14,24.85 79.76,24.47 | 37.47,12.28 37.47,13.04 37.72,13.29 SJ1.1 37.85,13.29 38.35,12.79 41.78,12.79 R2.1 41.91,12.79 46.86,17.74 46.86,28.28 EPD_C12.1 46.99,28.41 46.99,30.95 47.37,31.33 R4.1 47.37,31.45 46.1,32.73 46.1,34.5 | 46.1,34.5 46.1,35.77 47.88,37.55 47.88,39.08 C7.2 | 46.1,34.5 47.12,34.5 47.24,34.63 47.24,35.65 47.5,35.9 50.42,35.9 52.58,33.74 53.47,33.74 D3.1
  Top 0.127: 14.48,92.8 14.48,92.16 15.37,91.27 J4.G2 15.49,91.14 16.26,90.38 16.26,87.34 15.49,86.57 15.49,85.56 J4.G1 | 14.48,92.8 14.48,99.4 C9.2 14.48,99.53 14.48,101.05 20.7,107.27 C_DELAY.1 20.83,107.4 24.38,107.4 BOOT_BUTTON1.2 24.51,107.53 26.42,107.53 27.18,108.29 42.8,108.29 43.43,107.66 RESET_BUTTON.2 43.56,107.53 47.24,103.84 47.24,98.13 | TP4.TP 60.2,90 55.24,90 TP5.TP 55.12,90 55.12,93.94 50.93,98.13 C5.2 | 47.24,98.13 50.8,98.13 C5.2 | 47.24,98.13 46.23,98.13 45.59,97.5 43.81,97.5 IC1.3 43.69,97.37 40.64,100.42 C6.2 | C5.2 50.93,98.26 57.91,105.24 61.09,105.24 C10.2 61.21,105.24 62.23,104.23 72.77,104.23 73.28,104.73 73.28,106.77 72.52,107.53 67.94,107.53 67.31,106.89 65.41,106.89 CHANGE_BUTTON2.2 | U50.9 43.94,52.16 42.16,50.38 40.13,50.38 U50.4 40.01,50.25 v39.24,50.25 | 17.4,34.5 17.4,31.33 D11.1 | 17.4,34.5 16.76,35.14 D8.1 16.64,35.27 16.13,35.27 7.62,43.77 U2.1 7.75,43.9 7.75,46.19 11.43,49.87 12.19,49.87 U2.29_1 | 25.02,31.96 25.02,34.5 24.38,35.14 D700.1 24.26,35.14 23.62,34.5 17.4,34.5 | 25.02,31.96 25.02,31.33 D10.1 | 32,31.33 27.81,31.33 27.18,31.96 25.02,31.96 | 32,31.33 32.64,31.33 D9.1 32.77,31.2 32.77,15.2 35.69,12.28 37.47,12.28 | v32,33.87 31.5,34.38 31.5,34.76 D12.1 | 32,31.33 v32,32.22 | 4.7,92.8 4.19,93.3 4.06,93.3 2.16,95.21 J4.G4 | 4.7,92.8 1.27,89.37 1.27,82.51 J4.G3 1.27,82.38 1.27,67.78 7.62,61.43 U2.28 7.75,61.3 7.75,56.86 12.19,52.41 U2.29_3 12.32,52.41 13.34,52.41 U2.29_6 13.46,52.41 14.61,52.41 U2.29_9 14.73,52.28 14.73,51.14 U2.29_8 14.73,51.01 14.73,50 U2.29_7 14.61,50 13.46,50 | 4.7,92.8 J4.P6 4.83,92.8 v9.91,92.8
  Top 0.127: U2.29_1 12.19,50 12.19,51.01 U2.29_2 | 13.46,50 13.46,51.01 U2.29_5 | U2.29_1 12.32,50 13.34,50 U2.29_4 13.46,50 | v13.72,92.8 14.48,92.8 | v89.41,23.84 88.65,23.07 EPD_C1.1
  Top 0.152: 60,0 0,0 0,111.2 92.2,111.2 92.2,67.2 170.2,67.2 170.2,0 78.2,0 78.2,10 60,10 60,0
  Bottom 0.127: v112.65,35.9 112.65,36.15 111.25,37.55 | v111.25,38.06 111.25,37.55 | v32,32.22 v32,33.87 32,37.3 39.24,44.54 v39.24,50.25 | v9.91,92.8 v13.72,92.8 | 111.25,37.55 103.12,37.55 v89.41,23.84
  pour Top: 170.12,0.08 170.12,67.12 92.18,67.12 92.16,67.14 92.14,67.16 92.12,67.18 92.12,111.12 0.08,111.12 0.08,0.08 59.92,0.08 59.92,10.02 59.94,10.04 59.96,10.06 59.98,10.08 78.22,10.08 78.24,10.06 78.26,10.04 78.28,10.02 78.28,0.08
  pour Bottom: 170.12,0.08 170.12,67.12 92.18,67.12 92.16,67.14 92.14,67.16 92.12,67.18 92.12,111.12 0.08,111.12 0.08,0.08 59.92,0.08 59.92,10.02 59.94,10.04 59.96,10.06 59.98,10.08 78.22,10.08 78.24,10.06 78.26,10.04 78.28,10.02 78.28,0.08
GPIO8
  Top 0.127: R2_BAT1.1 20.45,39.58 20.45,42.38 19.05,43.77 U2.10
I2C_PW  (via drill 0.3)
  Top 0.127: 163.07,7.45 160.15,10.37 160.15,10.63 | 163.07,7.45 164.08,6.44 R1_PINH.2 | 160.15,10.63 159.64,11.13 159.38,11.13 SENSOR2.6 | 160.15,10.63 161.42,11.9 162.18,11.9 SENSOR2.2 | 155.83,6.18 156.08,6.18 157.1,7.2 C1.1 157.23,7.32 157.35,7.45 158.37,7.45 | 155.83,6.18 153.03,6.18 R2_PINH.2 152.91,6.18 121.28,6.18 v87.12,40.34 | 158.37,7.45 160.66,7.45 C2.1 | 158.37,7.45 158.37,12.02 158.88,12.53 159,12.53 159.26,12.79 SENSOR2.8 | v22.48,60.28 21.72,61.05 21.72,61.3 U2.17 | 163.07,7.45 161.04,5.42 156.59,5.42 155.83,6.18
  Bottom 0.127: v22.48,60.28 35.56,60.28 42.29,53.55 73.91,53.55 v87.12,40.34
INT_RTC  (via drill 0.3)
  Top 0.127: 84.33,64.22 88.27,64.22 R1_PINH1.1 | 84.33,64.22 81.92,61.81 81.92,52.03 82.42,51.52 U4.3 | v16.64,47.2 16.64,43.9 U2.8 | v23.5,54.06 23.5,59.14 26.29,61.94 26.29,71.97 TP15.TP 26.42,72.09 44.2,72.09 63.37,91.27 65.91,91.27 84.33,72.86 84.33,64.22
  Bottom 0.127: v23.5,54.06 v16.64,47.2
IO/BOOT
  Top 0.127: C6.1 40.64,106.51 32.51,106.51 R_BOOT.1 32.38,106.51 32,106.13 27.94,106.13 BOOT_BUTTON1.4 27.81,106 24.26,102.45 24.26,61.43 U2.15
IO/CHANGE  (via drill 0.3)
  Top 0.127: v64.26,106.51 61.21,106.51 C10.1 61.09,106.64 59.18,108.54 20.83,108.54 12.57,100.29 12.57,79.08 14.86,76.79 14.86,71.59 14.1,70.83 14.1,61.43 U2.23 | v67.56,106.51 68.83,105.24 CHANGE_BUTTON2.4 68.96,105.37 69.98,106.39 R_CHANGE.1
  Bottom 0.127: v67.56,106.51 v64.26,106.51
MISO  (via drill 0.3)
  Top 0.127: J4.P7 5.08,93.81 9.53,93.81 10.41,92.92 10.41,78.19 9.02,76.79 9.02,61.43 U2.27 9.02,61.3 9.02,59.52 21.34,47.2 21.34,46.7 v21.08,46.44 | 49.4,53.55 49.4,50 48.64,49.23 40.26,49.23 37.72,46.7 37.72,44.92 R8.1 37.72,44.79 v36.96,44.03 | 49.4,53.55 47.88,55.08 41.78,55.08 40.77,54.06 40.77,53.55 40.13,52.92 U50.2 | v33.02,40.09 33.02,34.88 D12.2 | v130.05,64.22 140.97,64.22 TP6.TP | v62.36,55.33 51.18,55.33 49.4,53.55
  Bottom 0.127: v36.96,44.03 v33.02,40.09 26.67,46.44 v21.08,46.44 | v130.05,64.22 129.79,64.22 128.14,65.87 72.9,65.87 v62.36,55.33
MOSI  (via drill 0.3)
  Top 0.127: v67.31,15.58 67.94,15.58 68.2,15.33 68.2,14.82 FH34SRJ-24S-0.5SH_99_.14 | v24.77,29.93 20.32,29.93 19.05,31.2 D11.2 | v46.99,50 47.24,50.25 47.88,50.25 U50.5 | v17.91,42.63 16.38,42.63 15.88,43.14 15.88,43.27 15.37,43.77 U2.7 | v3.68,94.32 3.68,99.78 R7.1 3.68,99.91 12.83,109.05 76.2,109.05 84.71,100.54 88.01,100.54 TP7.TP | v3.68,90.26 4.45,89.49 4.95,89.49 J4.P3
  Bottom 0.127: 45.85,15.58 39.12,15.58 25.4,29.3 | 45.85,15.58 v67.31,15.58 | 25.4,29.3 v24.77,29.93 20.7,29.93 12.19,38.44 12.19,42.5 8.51,46.19 8.51,76.79 3.68,81.62 v3.68,90.26 v3.68,94.32 | v46.99,50 46.99,25.74 43.43,22.18 43.43,21.93 44.58,20.79 45.47,20.79 45.85,20.41 45.85,15.58 | v17.91,42.63 17.91,38.95 26.29,30.57 26.29,30.18 25.4,29.3
N$1
  Top 0.127: R2_USB1.2 146.81,54.19 162.18,54.19 163.32,53.05 163.83,53.05 J2.A5
N$2
  Top 0.127: R2_USB.1 155.19,57.74 156.84,56.09 163.83,56.09 J2.B5
N$4
  Top 0.127: C1_BAT1.1 112.01,35.27 112.01,35.9 114.05,37.93 D2.1 114.17,38.06 116.46,38.06 | 116.46,38.06 117.09,38.06 IC4.3 | 116.46,38.06 116.46,39.46 116.59,39.58 116.71,39.58 117.09,39.96 IC4.1
N$5
  Top 0.127: FH34SRJ-24S-0.5SH_99_.24 63.25,14.82 61.72,14.82 48.26,28.28 EPD_C12.2
N$6
  Top 0.127: C4.1 46.74,35.27 46.74,35.52 48.39,37.17 53.47,37.17 D3.2 53.59,37.17 56.52,34.25 65.41,34.25 68.71,37.55 73.03,37.55 D4.1
N$8  (via drill 0.3)
  Top 0.127: v115.95,52.92 111.76,52.92 R1_BAT.2 | v126.75,49.36 127.38,48.73 127.76,48.73 U1.1
  Bottom 0.127: v115.95,52.92 123.19,52.92 v126.75,49.36
N$9
  Top 0.127: CHG_LED.C 131.83,50.12 129.92,50.12 125.98,54.06 111.12,54.06 110.36,53.3 110.36,53.05 R1_BAT.1
N$10
  Top 0.127: R2_BAT.2 118.11,52.54 121.28,52.54 125.09,48.73 U1.5
N$11
  Top 0.127: FH34SRJ-24S-0.5SH_99_.22 64.26,14.69 64.26,14.44 62.74,12.91 43.31,12.91 38.99,8.59 38.73,8.59 EPD_C10.2
N$12
  Top 0.127: FH34SRJ-24S-0.5SH_99_.16 67.31,14.82 67.69,14.82 FH34SRJ-24S-0.5SH_99_.15 67.82,14.69 67.82,14.44 69.22,13.04 79.38,13.04 81.92,15.58 81.92,18.75 EPD_C5.2
N$13
  Top 0.127: FH34SRJ-24S-0.5SH_99_.19 65.91,14.82 65.91,16.47 73.53,24.09 73.79,24.09 EPD_C7.2
N$14
  Top 0.127: FH34SRJ-24S-0.5SH_99_.18 66.29,14.82 66.29,16.47 73.28,23.45 78.49,23.45 78.99,23.96 EPD_C6.2
N$15
  Top 0.127: FH34SRJ-24S-0.5SH_99_.5 72.9,14.82 72.9,16.09 78.87,22.06 81.28,22.06 83.44,24.22 EPD_C2.2
N$16  (via drill 0.3)
  Top 0.127: v82.68,22.82 81.66,21.8 78.99,21.8 73.41,16.21 73.41,14.82 FH34SRJ-24S-0.5SH_99_.4 | v87.76,23.45 88.52,24.22 EPD_C1.2
  Bottom 0.127: v82.68,22.82 87.12,22.82 v87.76,23.45
N$17
  Top 0.127: IC1.5 46.48,99.4 46.48,101.56 41.4,106.64 41.4,106.89 41.02,107.27 29.21,107.27 28.7,106.77 21.46,106.77 20.83,106.13 C_DELAY.2
N$18
  Top 0.127: D7.1 89.66,68.03 89.66,65.75 93.22,62.19 R_CAPACITOR1.2
N$19
  Top 0.127: FH34SRJ-24S-0.5SH_99_.20 65.41,14.82 65.41,20.66 68.83,24.09 EPD_C8.2
PREVGH
  Top 0.127: FH34SRJ-24S-0.5SH_99_.21 64.77,14.82 64.77,20.28 62.48,22.56 62.48,23.58 63.12,24.22 EPD_C9.2 63.25,24.34 72.39,33.49 72.39,33.74 D5.1
PREVGL
  Top 0.127: 76.83,33.36 76.58,33.11 75.31,33.11 74.04,34.38 71.75,34.38 71.63,34.25 71.63,33.23 69.34,30.95 68.71,30.95 62.23,24.47 62.23,22.44 63.75,20.91 63.75,14.82 FH34SRJ-24S-0.5SH_99_.23 | 76.83,33.36 76.83,37.42 76.71,37.55 D4.2 | 76.83,33.36 80.64,33.36 90.04,23.96 90.04,18.88 EPD_C11.2
RESE  (via drill 0.3)
  Top 0.127: FH34SRJ-24S-0.5SH_99_.3 73.79,14.82 73.79,16.21 75.69,18.12 81.15,18.12 81.41,18.37 81.41,19.39 81.53,19.52 86.87,19.52 88.27,18.12 90.55,18.12 90.68,18.25 90.68,25.49 81.15,35.01 R3.2 81.03,35.01 v80.39,34.38 | v69.22,31.45 57.78,31.45 Q3.2
  Bottom 0.127: v69.22,31.45 77.47,31.45 v80.39,34.38
RESE'
  Top 0.127: SJ1.2 36.32,13.42 36.32,13.67 37.08,14.44 38.48,14.44 38.86,14.06 41.78,14.06 R2.2 41.91,14.06 44.58,16.72 44.58,38.19 46.48,40.09 65.41,40.09 67.06,38.44 77.09,38.44 79.63,35.9 79.63,35.14 R3.1
RESET  (via drill 0.3)
  Top 0.127: 49.28,107.02 48.01,107.02 46.99,106 RESET_BUTTON.4 | 49.28,107.02 50.67,107.02 R_RESET.1 | v45.72,99.4 43.81,99.4 IC1.1 | C5.1 50.8,99.4 v50.04,99.4 49.28,100.16 49.28,107.02 | v10.29,45.42 10.29,43.9 U2.3
  Bottom 0.127: v50.04,99.4 v45.72,99.4 10.29,63.97 v10.29,45.42
RTC_RST  (via drill 0.3)
  Top 0.127: v79.38,56.09 33.53,56.09 30.99,53.55 23.37,53.55 22.99,53.93 22.99,61.3 U2.16 | v82.55,52.92 83.69,51.77 83.69,51.52 U4.4
  Bottom 0.127: v82.55,52.92 v79.38,56.09
RX  (via drill 0.3)
  Top 0.127: v13.59,64.73 13.59,64.35 12.83,63.59 12.83,61.43 U2.24 | v69.47,88.99 70.36,89.88 TP2.TP
  Bottom 0.127: v13.59,64.73 45.21,64.73 v69.47,88.99
SCK  (via drill 0.3)
  Top 0.127: v68.83,15.96 68.83,14.82 FH34SRJ-24S-0.5SH_99_.13 | v48.64,50.89 48.01,51.52 U50.6 47.88,51.52 47.5,51.52 45.72,49.74 v22.1,49.74 | v25.78,30.44 26.54,31.2 D10.2 | v14.22,45.04 14.22,44.03 14.1,43.9 U2.6 | v8,98.64 8,99.78 R6.1 8.13,99.91 17.02,108.8 71.63,108.8 79.88,100.54 82.93,100.54 TP8.TP | v5.97,92.29 5.71,92.29 5.08,91.65 J4.P5
  Bottom 0.127: v68.83,15.96 68.83,16.21 48.64,36.41 v48.64,50.89 | v25.78,30.44 20.57,30.44 14.22,36.79 v14.22,45.04 | v8,98.64 8,94.32 v5.97,92.29 9.78,88.48 9.78,45.3 10.16,44.92 10.41,44.92 11.05,45.55 12.95,45.55 13.46,45.04 v14.22,45.04 | v22.1,49.74 19.81,49.74 15.11,45.04 v14.22,45.04
SCL  (via drill 0.3)
  Top 0.127: v18.67,60.28 17.91,61.05 17.91,61.3 U2.20 | v35.05,60.79 79.88,60.79 U4.16 80.01,60.67 v80.01,58.89 | v142.24,50.38 U3.7 | v163.07,22.18 164.59,20.66 J3.4 | v153.03,12.15 153.03,7.45 R2_PINH.1 | v161.29,11.01 161.8,10.5 162.18,10.5 SENSOR2.4
  Bottom 0.127: v18.67,60.28 21.84,60.28 22.35,60.79 v35.05,60.79 | 156.59,15.71 v163.07,22.18 163.07,32.09 144.78,50.38 v142.24,50.38 127.25,65.36 88.9,65.36 81.41,57.87 81.03,57.87 v80.01,58.89 | 156.59,15.71 v153.03,12.15 | 156.59,15.71 v161.29,11.01
SDA  (via drill 0.3)
  Top 0.127: v20.7,63.2 19.18,61.68 19.18,61.43 U2.19 | v69.6,63.2 79.12,63.2 80.64,61.68 | 80.64,61.68 81.15,61.17 81.15,60.79 U4.15 | 162.69,11.13 164.08,9.74 164.08,7.71 R1_PINH.1 | 162.69,11.13 162.31,11.13 SENSOR2.3 162.69,11.13 | v142.75,50.89 136.27,50.89 U3.8 | v163.58,20.41 164.34,19.64 164.59,19.64 J3.3 | v163.58,12.02 162.69,11.13 | v81.15,62.19 80.64,61.68
  Bottom 0.127: v69.6,63.2 v20.7,63.2 | v163.58,12.02 v163.58,20.41 163.58,31.96 144.65,50.89 v142.75,50.89 128.02,65.62 87.76,65.62 84.33,62.19 v81.15,62.19
SRC
  Top 0.127: C4.2 48.01,35.14 50.8,35.14 55.24,30.69 55.5,30.69 Q3.3 55.63,30.69 55.88,30.69 59.18,33.99 70.87,33.99 74.42,37.55 | 74.42,37.55 73.79,38.19 65.91,38.19 64.9,37.17 L1.1 | 74.42,37.55 75.95,36.03 75.95,33.87 D5.2
SS_SD  (via drill 0.3)
  Top 0.127: v25.78,41.36 37.34,41.36 40.51,44.54 42.67,44.54 R10.1 | D8.2 18.29,35.27 19.68,35.27 v22.86,38.44 22.86,39.58 22.23,40.22 21.34,40.22 21.21,40.09 21.21,39.08 20.95,38.82 19.94,38.82 16.38,42.38 12.83,42.38 12.06,43.14 12.06,43.27 11.56,43.77 U2.4 11.43,43.9 11.43,44.92 v9.27,47.08 | v9.27,84.41 5.46,88.22 J4.P2
  Bottom 0.127: v22.86,38.44 v25.78,41.36 | v9.27,47.08 v9.27,84.41
TX  (via drill 0.3)
  Top 0.127: v41.66,55.58 33.4,55.58 30.1,52.28 20.45,52.28 12.06,60.67 12.06,60.79 11.56,61.3 U2.25 | v87.76,40.34 90.04,40.34 112.52,17.87 130.94,17.87 132.33,19.26 TP1.TP
  Bottom 0.127: v41.66,55.58 61.47,55.58 62.74,54.31 73.79,54.31 v87.76,40.34
USB_D+
  Top 0.127: D1.3 152.4,53.17 152.4,39.58 133.48,20.66 116.08,20.66 113.54,18.12 112.65,18.12 89.92,40.85 25.65,40.85 24.26,42.25 24.26,43.77 U2.14
USB_D-  (via drill 0.3)
  Top 0.127: v150.11,44.41 150.24,44.54 150.24,46.95 150.5,47.2 150.5,53.17 D1.1 | v88.52,38.31 77.6,38.31 75.31,40.6 25.53,40.6 22.99,43.14 22.99,43.77 U2.13
  Bottom 0.127: v150.11,44.41 94.61,44.41 v88.52,38.31
VBAT
  Top 0.127: U3.2 134.37,50.25 134.37,49.87 U3.3 133.99,49.87 133.6,49.49 | 133.6,49.49 133.6,49.23 134.75,48.09 134.75,46.06 Q1.3 | 111,52.54 112.9,50.63 118.49,50.63 122.43,46.7 123.19,46.7 C2_BAT.1 | 111,52.54 111,53.55 111.12,53.68 124.71,53.68 127.76,50.63 U1.3 127.89,50.5 129.16,50.5 130.18,49.49 133.6,49.49 | 111,52.54 108.58,50.12 82.17,50.12 81.66,50.63 81.66,62.32 65.41,78.57 65.41,89.88 TP3.TP
VBUS
  Top 0.127: 149.73,50.12 149.73,46.57 C5_USB.1 149.61,46.44 149.61,43.27 | 149.73,50.12 146.18,53.68 146.18,54.82 147.96,56.6 150.88,56.6 151.38,56.09 151.38,55.84 D1.5 | 149.73,50.12 C4_USB.1 | 149.61,43.27 149.61,40.22 PFMF.050.1.2 | 131.95,48.09 131.95,45.93 133.86,44.03 Q1.1 | 131.95,48.09 131.95,48.6 CHG_LED.A | R1_PWRUSB.2 131.32,39.2 131.32,41.36 133.86,43.9 Q1.1 | 127.13,48.09 125.22,50 125.22,50.5 U1.4 | 131.95,48.09 127.13,48.09 | TP14.TP 113.03,19.52 113.03,32.98 111.38,34.63 111.38,36.41 113.41,38.44 113.41,39.46 114.05,40.09 D2.2 114.17,40.22 114.17,45.42 117.6,48.85 C1_BAT.1 117.73,48.85 121.92,44.66 123.83,44.66 123.95,44.79 123.95,44.92 127.13,48.09 | 149.61,43.27 134.62,43.27 133.99,43.9 Q1.1
VRTC
  Top 0.127: C10_SUPERCAP.1 99.44,55.2 94.36,55.2 C8.2 94.23,55.2 93.34,56.09 93.34,59.52 | 93.34,59.52 93.34,60.67 R_CAPACITOR1.1 | 93.34,59.52 83.31,59.52 82.55,60.28 82.55,60.67 U4.14
VUSB
  Top 0.127: J2.A9 163.96,56.73 163.96,56.6 J2.B4 163.96,56.47 164.47,56.47 164.97,55.97 164.97,52.54 164.47,52.03 163.96,52.03 J2.B9 163.96,51.9 163.96,51.77 J2.A4 163.83,51.65 163.32,51.65 154.31,42.63 154.31,40.22 PFMF.050.1.1